# Altium PCB Power_REV_2.PcbDoc
Units mil, origin at the board's own origin, x right, y up, seen from the top; angles counter-clockwise.
Board outline 2175 x 1479.04 mil, 2 copper layers (Top Layer, Bottom Layer); 19 components, 12 nets, 52 pads, 0 vias.
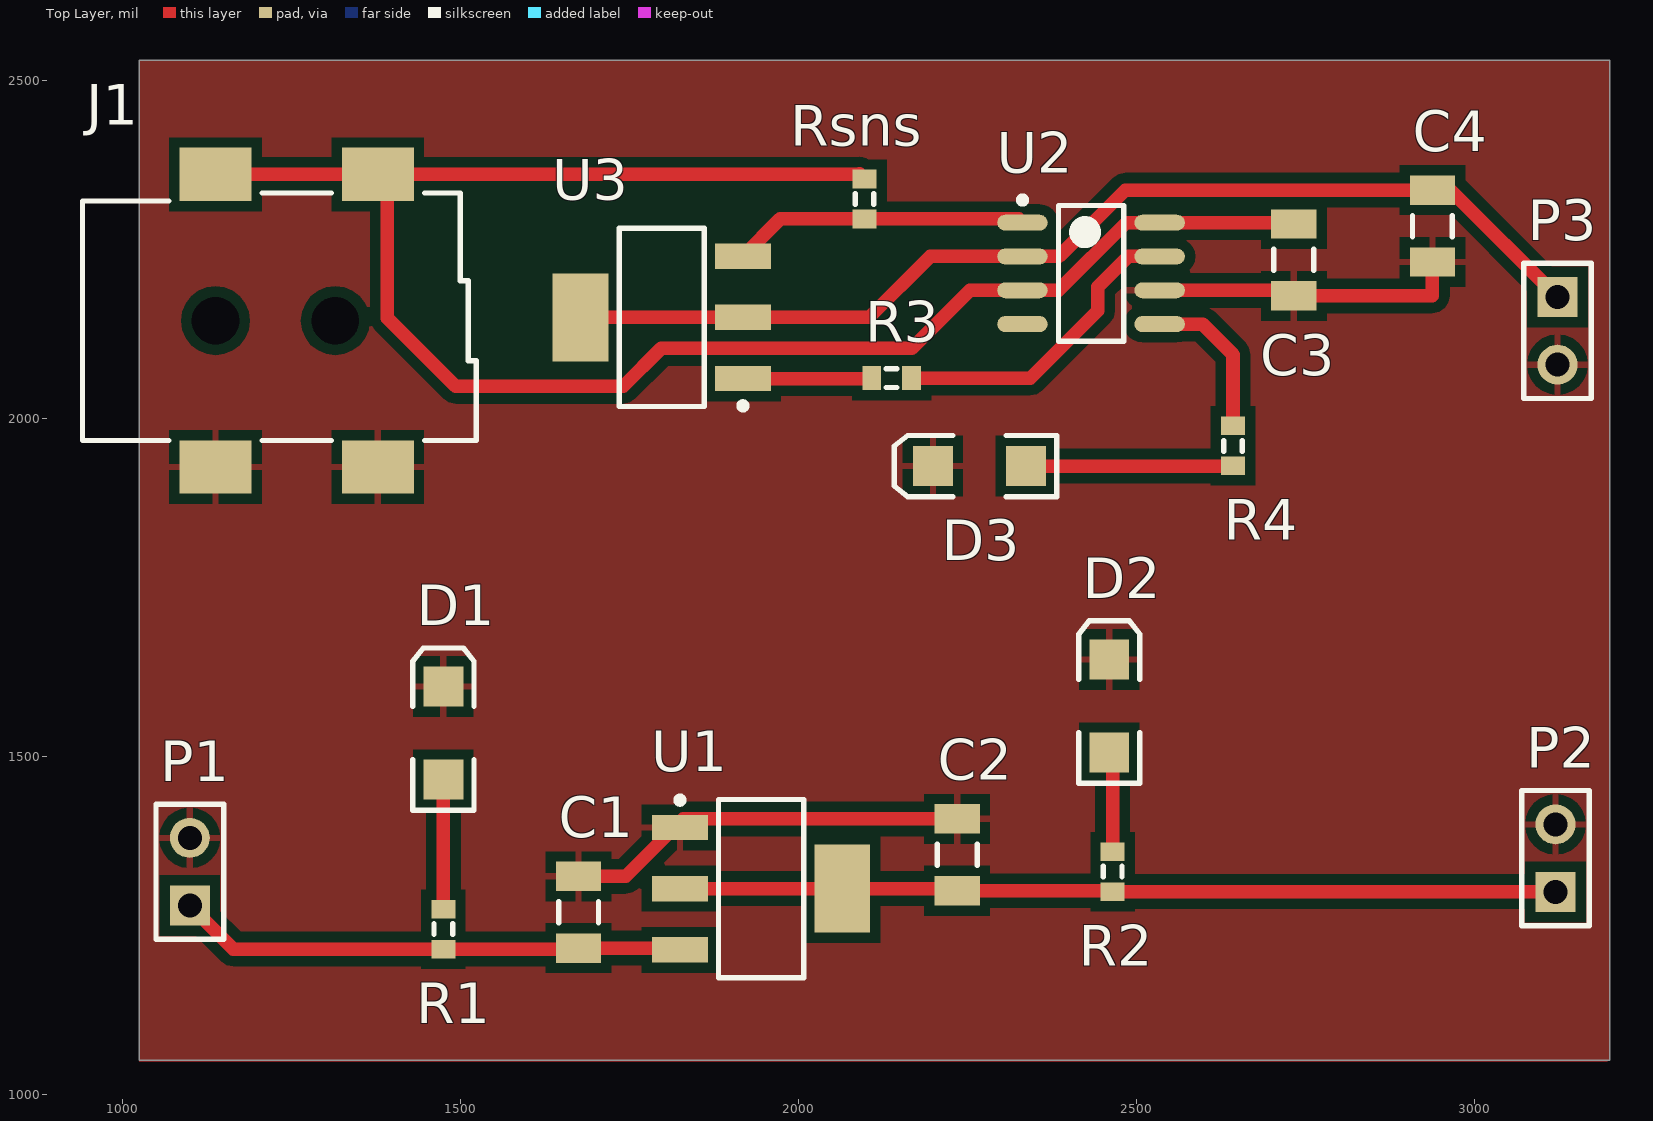
[diagram p0: Top Layer view]
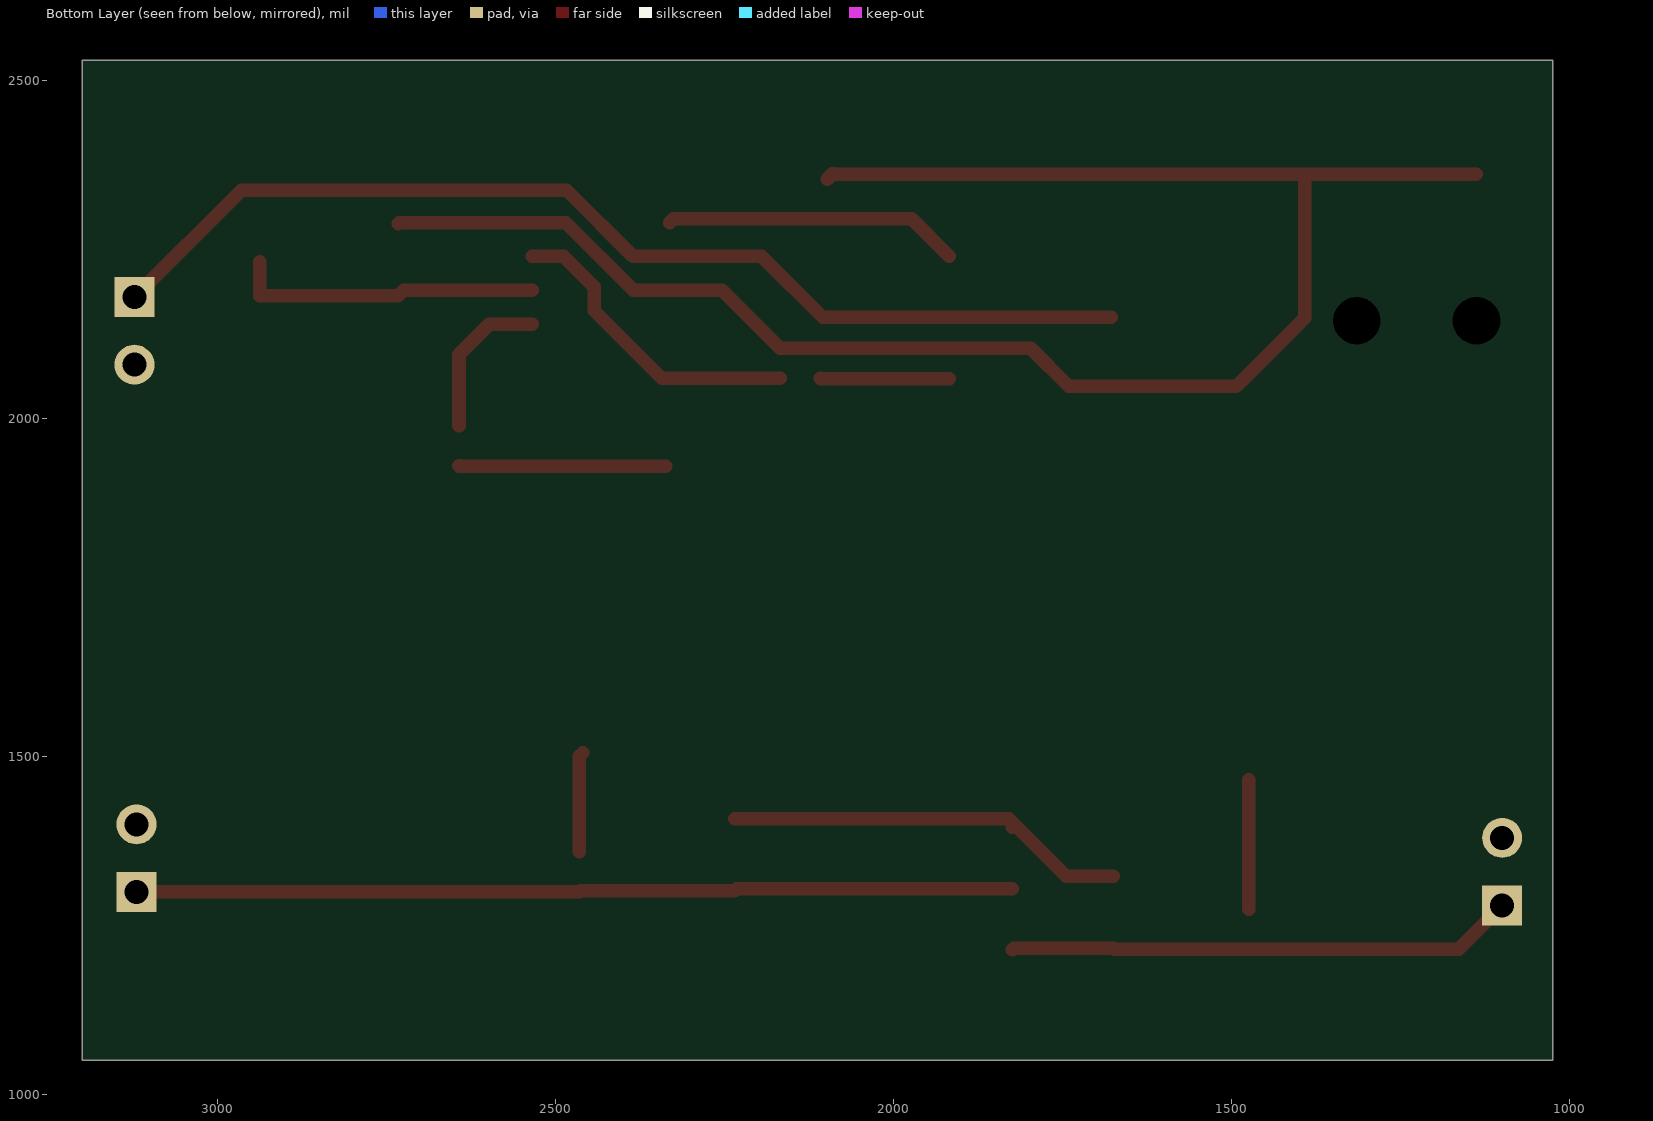
[diagram p1: Bottom Layer view, seen from below]

## Layer stack, top to bottom
Top Layer: signal copper 1.4
Dielectric: dielectric 12.6, FR-4, Dk 4.8
Bottom Layer: signal copper 1.4

## Board outline
1025,2530 3200,2530 3200,1050.96 1025,1050.96

## Design rules (kind name [scope] priority, off if disabled: settings)
Clearance [All] p1: gap=15
PolygonConnect [All] p1: connectstyle=Relief reliefconductorwidth=10 reliefentries=4 polygonreliefangle="90 Angle"
RoutingVias [All] p1: holewidth=28 width=50 viastyle="Through Hole" minholewidth=28 minwidth=50 maxholewidth=28 maxwidth=50
SilkscreenOverComponentPads [All] p1: minsilkscreentomaskgap=10
SolderMaskExpansion [All] p1: expansion=4
Width [All] p1: maxlimit=20 minlimit=20 preferedwidth=20
27 further rules are at their usual default settings.

## Components (designator, comment, footprint, x,y, rotation, side; value= is the part's Value field where it differs from the comment)
C1 "Cap Semi" C1206 1675,1270 r270 top
C2 "Cap Semi" C1206 2235,1355 r270 top
C3 "Cap Semi" C1206 2733,2235 r90 top
C4 "Cap Semi" C1206 2938,2285 r90 top
D1 "LED2" 3.2X1.6X1.1 1475,1535 r90 top
D2 "LED2" 3.2X1.6X1.1 2460,1575 r90 top
D3 "LED2" 3.2X1.6X1.1 2268,1930 r180 top
J1 "DC Barrel Jack" SCKT/SM4.5-2H4 1138,2145 r0 top
P1 "Header 2" HDR1X2 1100,1280 r90 top
P2 "Header 2" HDR1X2 3120,1300 r90 top
P3 "Header 2" HDR1X2 3123,2180 r270 top
R1 "Res3" J1-0603 1475,1245 r90 top
R2 "Res3" J1-0603 2465,1330 r90 top
R3 "Res3" J1-0603 2138,2060 r180 top
R4 "Res3" J1-0603 2643,1960 r90 top
Rsns "Res3" J1-0603 2098,2325 r270 top
U1 "REG1117-5" SOT230P700X180-4N 1945,1305 r0 top
U2 "BQ2057T" SOIC127P600X178-8N 2433,2215 r0 top
U3 "FZT788BTA" SOT230P700X180-4N 1798,2150 r180 top

## Footprints (in the part's own frame and the unit in brackets; to place one, negate y for a bottom-side part, rotate by r counter-clockwise, add the part's x,y. Pads: shape width x height; smd on the part's side, far side on the other; paste and mask are expansions set on the pad)
3.2X1.6X1.1 [mm] "SMT LED; 2 Flat Leads"
  rect 1.5x1.5 smd: 1(-1.75,0) 2(1.75,0)
  silkscreen extent -2.9,-1.15 3.2,1.15
C1206 [mm] "Chip Capacitor, Body 3.2x1.6mm, IPC High Density"
  rect 1.1x1.7 smd: 1(-1.35,0) 2(1.35,0)
  silkscreen extent -0.4,-0.75 0.4,0.75, body extent -1.7,-0.9 1.7,0.9, height 1.3
HDR1X2 [mm] "Connector; Header; 2 Position"
  rect 1.5x1.5 hole 0.9: 1(0,0)
  round 1.5 hole 0.9: 2(2.54,0)
  silkscreen extent -1.27,-1.27 3.81,1.27
J1-0603 [mm] "Chip Resistor, Body 1.6x0.8mm, IPC High Density"
  rect 0.7x0.9 smd: 1(-0.75,0) 2(0.75,0)
  silkscreen extent -0.2,-0.35 0.2,0.35, body extent -0.85,-0.48 0.85,0.48, height 0.9
SCKT/SM4.5-2H4 [mm] "Connector; Low Power Socket, SM, Right Angle, Body 14.8 x 9 x 11 mm (LxWxH)"
  rect 2.7x2 smd: 1(0,5.5) 1(6.1,5.5) 2(0,-5.5) 3(6.1,-5.5)
  round 1.5 hole 1.8: MH1(0,0) MH2(4.5,0)
  silkscreen extent -5,-4.5 9.8,4.8, body extent -5,-4.5 9.8,4.8, height 11
SOIC127P600X178-8N [mm] "SOIC, 8-Leads, Body 5.1x4.1mm (max), Pitch 1.27mm, IPC Medium Density"
  oval 1.9x0.6 smd: 1(-2.575,1.905) 2(-2.575,0.635) 3(-2.575,-0.635) 4(-2.575,-1.905) 5(2.575,-1.905) 6(2.575,-0.635) 7(2.575,0.635) 8(2.575,1.905)
  silkscreen extent -2.7,-2.55 1.22,2.88, body extent -2.03,-2.54 2.03,2.54, height 1.78
SOT230P700X180-4N [mm] "SOT223, 4-Leads, Body 6.7x7.3mm (max), Pitch 2.30mm, IPC Medium Density"
  rect 2.1x0.95 smd: 1(-3.05,2.3) 2(-3.05,0) 3(-3.05,-2.3)
  rect 2.1x3.3 smd: 4(3.05,0)
  silkscreen extent -3.17,-3.35 1.6,3.45, body extent -1.85,-3.35 1.85,3.35, height 1.8

## Part data
C1 C2 C3 C4: "Capacitor (Semiconductor SIM Model)"
D1 D2 D3: "Typical RED, GREEN, YELLOW, AMBER GaAs LED"
P1 P2 P3: "Header, 2-Pin"
R1 R2 R3 R4 Rsns: "Resistor"

## Nets (pads, with @x,y where several pads share a name; then routed paths per layer and width w, separated by ;. In a path a pad name is that pad's centre, name@x,y a point inside that pad or via, vN(x,y) a via of type N, cw(c..) or ccw(c..) an arc to the next point about the centre after c; other vN are vias at no path point)
5V: C2.2 P2.1 R2.1 U1.2 U1.4 | length 1297.1
  Top Layer w20: U1.2 U1.4 2231.85,1305 C2.2 2463.62,1301.85 R2.1 3119.53,1300.47 P2.1
6V: C1.2 P1.1 R1.1 U1.3 | length 753.2
  Top Layer w20: P1.1 1164.53,1215.47 R1.1 1673.62,1215.47 C1.2 1822.52,1216.85 U1.3
BAT: C4.2 P3.1 U2.2 U3.2 U3.4 | length 1588.5
  Top Layer w20: U3.4 U3.2 2105,2150 2195,2240 U2.2 2385.5,2240 2483.65,2338.15 C4.2 2964.85,2338.15 P3.1
GND: C1.1 C2.1 C3.1 C4.1 D1.2 D2.2 D3.2 J1.2 J1.3 P1.2 P2.2 P3.2 U1.1 U2.6 | length 1057.5
  Top Layer w20: C1.1 1745,1323.15 U1.1@1821.16,1399.31 ; U1.1 U1.1@1821.16,1399.31 ; C2.1 1830,1408.15 U1.1@1821.16,1399.31 ; U2.6 2724.85,2190 C3.1 2938,2181.85 C4.1
NetD1_1: D1.1 R1.2 | length 191.6
  Top Layer w20: R1.2 D1.1
NetD2_1: D2.1 R2.2 | length 148.6
  Top Layer w20: D2.1 2465,1501.1 R2.2
NetD3_1: D3.1 R4.1 | length 306.3
  Top Layer w20: D3.1 2642.53,1930 R4.1
NetR3_1: R3.1 U2.7 | length 461.9
  Top Layer w20: R3.1 2343,2060 2442.86,2159.86 2442.86,2194.86 2488,2240 U2.7
NetR3_2: R3.2 U3.1 | length 190.6
  Top Layer w20: U3.1 2107.92,2059.45 R3.2
NetR4_2: R4.2 U2.5 | length 232.7
  Top Layer w20: U2.5 2598,2140 2643,2095 R4.2
NetRsns_2: Rsns.2 U2.1 U3.3 | length 438.6
  Top Layer w20: U3.3 1973,2295.47 Rsns.2 2326.15,2295.47 U2.1
POWER: C3.2 J1.1 Rsns.1 U2.3 U2.8 | length 2659.5
  Top Layer w20: J1.1@1138,2361.54 1378.16,2361.54 J1.1@1392,2361.54 ; Rsns.1 2090.53,2362 1531.54,2361.54 J1.1@1392,2361.54 ; C3.2 2731.15,2290 U2.8 2485,2290 2385,2190 U2.3 2254,2190 2168,2104 1797,2104 1741,2048 1493,2048 1392,2149 J1.1@1392,2361.54
pads on no net: J1.MH1 J1.MH2 U2.4

## Polygon pours and split planes (outlines as drawn)
GND on Top Layer "GND" (solid, remove dead copper, pour order 2): 1025,2530 3200,2530 3200,1045 3195.21,1049.08 1025,1049.08